# Altium PCB shkb_lite.PcbDoc (part 2 of 2)
Units mm, origin at the board's own origin, x right, y up, seen from the top; angles counter-clockwise.
Board outline 141.5 x 36 mm, 2 copper layers (Top Layer, Bottom Layer), stack 1.57 mm thick; 74 components, 72 nets, 370 pads, 296 vias.
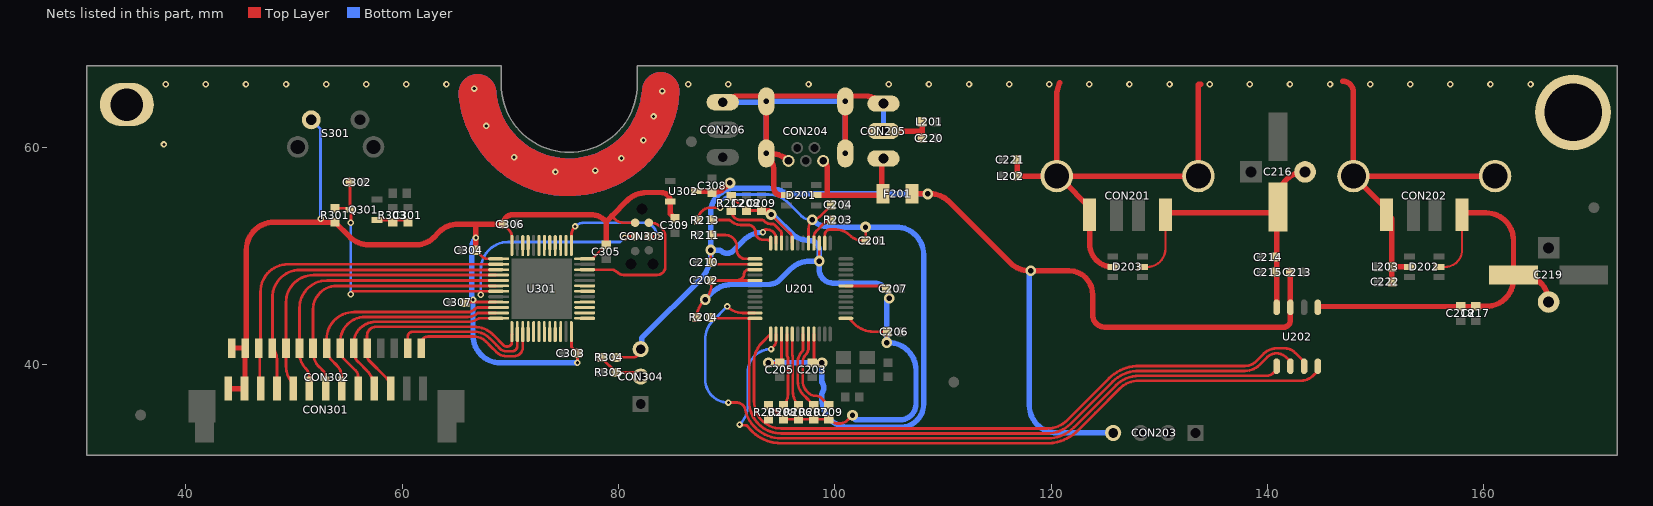
[diagram p2: the nets of this part, all layers, seen from the top]

## Via types
v1: diameter 0.6, hole 0.3, Top Layer to Bottom Layer, tented both sides, 257 vias
v2: diameter 0.6, hole 0.3, Top Layer to Bottom Layer, tented bottom, 25 vias
v3: diameter 1, hole 0.5, Top Layer to Bottom Layer, tented both sides, 14 vias

## Nets (pads, with @x,y where several pads share a name; then routed paths per layer and width w, separated by ;. In a path a pad name is that pad's centre, name@x,y a point inside that pad or via, vN(x,y) a via of type N, cw(c..) or ccw(c..) an arc to the next point about the centre after c; other vN are vias at no path point) (continued)
NetC301_2: C301.2 Q301.1 R303.1 | length 2.7
  Top Layer w0.254: Q301.1@57.658,53.34 C301.2@60.289,53.34
  Top Layer w0.5: C301.2@60.497,53.132 C301.2@60.522,53.132
NetCON304_2: CON304.2 R304.2 R305.1 | length 4.4
  Top Layer w0.254: R304.2@78.471,40.64 78.744,40.367 78.744,40.27 79.473,39.541 79.498,39.541 79.771,39.268 R305.1@79.771,39.243 81.661,39.243 cw(c81.661,38.862) CON304.2@82.042,38.862
NetR203_2: R203.2 U201.28 | length 3
  Top Layer w0.254: U201.28@98.065,51.198 98.065,51.76 cw(c98.882,51.76) 98.304,52.338 99.055,53.089 cw(c99.68,52.464) 99.069,53.103 cw(c99.68,52.464) R203.2@99.68,53.348
NetR206_1: R206.1 U201.5 | length 6.7
  Top Layer w0.254: U201.5@96.065,42.798 96.065,40.875 ccw(c96.319,40.876) 96.077,40.798 cw(c95.335,40.555) 96.116,40.555 96.116,37.5 ccw(c97.929,37.5) R206.1@96.647,36.218
NetR207_1: R207.1 U201.7 | length 7.3
  Top Layer w0.254: U201.7@97.065,42.798 97.065,41.377 cw(c96.811,41.377) 97.012,41.222 cw(c96.641,41.51) 96.972,41.177 ccw(c97.948,40.204) 96.785,40.943 ccw(c97.948,40.204) 96.595,40.464 ccw(c97.948,40.204) 96.57,40.204 96.57,38.437 ccw(c98.369,38.437) 97.096,37.166 ccw(c98.369,38.437) 97.098,37.164 97.223,37.039 ; 97.223,37.039 ccw(c98.19,38.003) 97.225,37.037 ccw(c98.19,38.003) 97.305,36.963 cw(c97.141,36.77) 97.353,36.909 97.746,36.516 97.746,36.491 98.019,36.218 R207.1@98.044,36.218
NetR208_1: R208.1 U201.4 | length 7.3
  Top Layer w0.254: R208.1@95.25,36.218 ccw(c94.255,37.213) 95.662,37.213 95.662,40.555 ; U201.4@95.565,42.798 95.565,40.875 ccw(c95.819,40.876) 95.607,40.737 cw(c95.335,40.555) 95.662,40.555 ; 95.662,40.013 95.662,40.555
NetR209_1: R209.1 U201.8 | length 7.8
  Top Layer w0.254: U201.8@97.565,42.798 97.565,41.51 cw(c96.641,41.51) 97.295,40.858 ccw(c97.948,40.204) 97.024,40.204 97.024,38.437 ccw(c98.369,38.437) 97.418,37.486 97.545,37.359 ccw(c98.19,38.003) 98.19,37.092 cw(c98.19,36.241) 98.791,36.843 R209.1@99.28,36.355
NetR211_2: R211.2 U201.37 | length 5.4
  Top Layer w0.254: R211.2@88.661,51.976 R211.2@88.661,51.951 89.871,51.951 cw(c89.871,50.89) 90.932,50.89 90.932,50.554 ccw(c91.738,50.554) 91.738,49.748 U201.37@92.615,49.748
NetR212_1: R212.1 U201.34 | length 6.6
  Top Layer w0.254: R212.1@90.424,54.222 ccw(c91.306,54.222) 91.306,53.34 93.267,53.34 cw(c93.266,53.086) 93.454,53.257 ccw(c94.107,53.848) 94.206,52.973 cw(c94.234,52.72) 94.413,52.9 94.738,52.575 ; 94.738,52.574 94.991,52.322 cw(c94.811,52.143) 95.065,52.143 U201.34@95.065,51.198
NetR213_2: R213.2 U201.36 | length 6.5
  Top Layer w0.254: R213.2@88.661,53.34 90.195,53.34 cw(c90.194,53.086) 90.371,53.268 ccw(c91.306,54.222) 91.306,52.886 91.982,52.886 cw(c91.982,52.204) 92.664,52.208 cw(c91.982,52.204) 92.664,52.204 ccw(c93.345,52.197) 93.345,51.516 93.747,51.516 cw(c93.747,51.198) 94.047,51.304 cw(c93.747,51.198) U201.36@94.065,51.198
NRST: C302.1 CON303.3 Q301.3 R301.2 U301.7 | length 43.6
  Top Layer w0.254: R301.2@53.791,54.432 55.116,54.432 Q301.3@55.173,54.375 ; C302.1@55.173,56.83 Q301.3@55.173,54.375 ; v1(55.245,46.482) 55.245,46.576 55.384,46.715 55.384,46.748 U301.7@68.669,46.748 ; v1(55.245,53.086) 55.258,53.099 Q301.3@55.258,54.29 Q301.3@55.173,54.375 ; v1(80.578,51.708) 80.671,51.708 80.779,51.816 CON303.3@81.534,51.816
  Bottom Layer w0.254: v1(55.245,46.482) v1(55.245,53.086) ; v1(67.271,46.429) 67.271,48.768 cw(c69.811,48.768) 69.811,51.308 80.137,51.308 v1@80.518,51.689
OVCB1: R204.1 U201.48 U202.2 | length 70.1
  Top Layer w0.254: R204.1@88.534,44.331 88.617,44.248 U201.48@92.075,44.248 ; 92.091,36.265 ccw(c95.04,36.574) 95.04,33.609 119.679,33.609 ccw(c119.679,36.149) 119.945,33.623 ccw(c119.656,36.603) 121.774,34.487 125.664,38.377 cw(c128.104,35.941) 125.668,38.381 cw(c128.104,35.941) 127.87,39.381 cw(c128.071,36.849) 128.071,39.389 137.922,39.389 ccw(c137.922,41.275) 139.254,39.94 ccw(c137.922,41.275) 139.257,39.943 139.981,40.667 cw(c140.836,39.811) 140.836,41.021 cw(c140.836,39.811) 141.691,40.667 142.113,40.245 U202.2@142.113,39.82 ; U201.48@92.615,44.248 92.096,44.248 92.075,44.227 92.075,36.574 ccw(c95.04,36.574) 92.837,34.589 ccw(c95.04,36.574) 92.859,34.565 ; 93.319,34.159 ccw(c95.04,36.574) 94.554,33.649
OVCB2: R205.1 U201.1 U202.3 | length 62.6
  Top Layer w0.254: U201.1@94.065,42.798 93.238,41.971 ccw(c94.95,40.259) 92.529,40.259 92.529,36.574 ccw(c95.04,36.574) 95.04,34.063 119.656,34.063 ccw(c119.656,36.603) 121.452,34.807 125.342,38.697 cw(c128.104,35.941) 125.348,38.703 cw(c128.104,35.941) 127.836,39.834 cw(c128.071,36.849) 128.071,39.843 137.922,39.843 ccw(c137.922,41.275) 138.934,40.263 139.659,40.987 cw(c140.836,39.811) 139.661,40.989 cw(c140.836,39.811) 140.836,41.475 141.591,41.475 cw(c141.591,40.118) 142.55,41.077 143.383,40.245 U202.3@143.383,39.82
PA0: CON301.6 CON302.8 U301.10 | length 22.2
  Top Layer w0.254: 53.466,40.387 cw(c54.583,41.502) 53.228,40.693 cw(c54.583,41.502) CON302.8@53.005,41.502 53.005,42.291 cw(c55.545,42.291) 55.545,44.831 66.062,44.831 ccw(c66.062,45.698) 66.675,45.085 cw(c67.069,44.691) 67.069,45.248 U301.10@68.669,45.248 ; 53.467,40.386 53.944,39.909 cw(c52.792,38.756) 54.422,38.756 CON301.6@54.422,37.749
PA1: CON301.5 CON302.9 U301.11 | length 20.8
  Top Layer w0.254: CON301.5@55.922,37.749 55.922,38.862 ccw(c55.102,38.862) 55.682,39.441 54.478,40.645 54.478,41.279 CON302.9@54.255,41.502 54.255,42.052 cw(c56.579,42.052) 56.579,44.377 66.062,44.377 ccw(c66.062,45.698) 66.915,44.689 cw(c67.077,44.494) 67.076,44.748 U301.11@68.669,44.748
PA2: CON301.4 CON302.10 U301.12 | length 19.2
  Top Layer w0.254: 55.943,40.196 cw(c57.003,41.255) 55.711,40.496 cw(c57.003,41.255) 55.505,41.255 CON302.10@55.505,41.502 55.505,41.897 cw(c57.531,41.897) 55.809,42.965 cw(c57.531,41.897) 56.463,43.619 cw(c57.531,41.897) 57.531,43.923 66.062,43.923 ccw(c66.062,45.698) 67.027,44.208 cw(c67.163,43.994) 67.162,44.248 U301.12@68.669,44.248 ; 55.944,40.195 56.737,39.402 cw(c55.084,37.749) 57.199,38.746 cw(c55.084,37.749) CON301.4@57.422,37.749
PA3: CON301.3 CON302.11 U301.13 | length 21.2
  Top Layer w0.254: CON301.3@58.922,37.749 ccw(c57.446,37.749) 58.489,38.793 56.908,40.374 cw(c57.277,40.744) 56.755,40.744 CON302.11@56.755,41.502 56.755,42.658 cw(c57.566,42.658) 57.566,43.469 66.639,43.469 cw(c66.639,41.014) 68.373,42.752 cw(c66.639,41.014) 68.378,42.747 69.368,41.757 ccw(c69.612,42) 69.612,41.656 69.754,41.656 ccw(c69.754,42.037) 70.135,42.037 70.135,42.764 U301.13@70.144,42.773
PA4: CON302.14 U301.14 | length 13.4
  Top Layer w0.254: CON302.14@60.505,41.502 60.505,42.545 cw(c60.975,42.545) 60.975,43.015 66.639,43.015 cw(c66.639,41.014) 68.053,42.43 cw(c66.639,41.014) 68.055,42.428 68.703,41.779 69.045,41.438 ccw(c69.612,42) 69.046,41.437 ccw(c69.612,42) 69.048,41.435 ccw(c69.612,42) 69.612,41.202 70.165,41.202 ccw(c70.165,41.681) 70.644,41.681 U301.14@70.644,42.773
PA5: CON302.15 U301.15 | length 12.5
  Top Layer w0.254: CON302.15@61.755,41.502 61.755,41.943 cw(c62.373,41.943) 61.767,42.064 cw(c62.373,41.943) 62.373,42.561 66.639,42.561 cw(c66.639,41.014) 67.732,42.108 68.186,41.655 68.723,41.118 ccw(c69.612,42) 68.724,41.116 ccw(c69.612,42) 68.728,41.113 ccw(c69.612,42) 69.612,40.748 70.353,40.748 ccw(c70.353,41.539) 71.144,41.539 U301.15@71.144,42.773
PA6: U301.16
PA7: U301.17
PA9: U301.30
PA10: U301.31
PA15: U301.38
PB0: U301.18
PB1: U301.19
PB2: U301.20
PB3: U301.39
PB4: U301.40
PB5: U301.41
PB6: U301.42
PB7: U301.43
PB8: U301.45
PB9: U301.46
PB10: U301.21
PB11: U301.22
PB12: U301.25
PB13: U301.26
PB14: U301.27
PB15: U301.28
PC13: CON301.11 CON302.3 U301.2 | length 32.3
  Top Layer w0.254: CON301.11@46.922,37.749 46.838,37.833 46.838,41.419 CON302.3@46.755,41.502 46.9,41.648 46.9,46.708 cw(c49.44,46.708) 49.44,49.248 U301.2@68.669,49.248
PC14: CON301.10 CON302.4 U301.3 | length 30.7
  Top Layer w0.254: CON301.10@48.422,37.749 48.422,40.496 ccw(c46.998,40.496) CON302.4@48.005,41.502 48.005,46.185 cw(c50.545,46.185) 50.545,48.725 68.059,48.725 68.082,48.748 U301.3@68.669,48.748
PC15: CON301.9 CON302.5 U301.4 | length 29
  Top Layer w0.254: CON301.9@49.916,37.744 CON301.9@49.922,37.749 49.922,38.227 cw(c51.532,39.837) 49.255,39.837 CON302.5@49.255,41.502 49.255,45.708 cw(c51.795,45.708) 51.795,48.248 U301.4@68.669,48.248
PF0: CON301.8 CON302.6 U301.5 | length 27.3
  Top Layer w0.254: CON301.8@51.422,37.749 51.422,38.774 ccw(c50.206,38.774) 51.181,39.499 ccw(c50.206,38.774) 51.066,39.633 cw(c52.42,40.988) 50.505,40.988 CON302.6@50.505,41.502 50.505,45.208 cw(c53.045,45.208) 53.045,47.748 U301.5@68.669,47.748
PF1: CON301.7 CON302.7 U301.6 | length 25.8
  Top Layer w0.254: 52.715,39.36 52.338,39.737 cw(c53.747,41.146) 51.755,41.146 CON302.7@51.755,41.502 51.755,45.069 cw(c53.933,45.069) 53.933,47.248 U301.6@68.669,47.248 ; 52.716,39.359 cw(c52.218,38.862) 52.922,38.862 CON301.7@52.922,37.749
PORT1_PWR: C214.2 C215.2 C216.1 CON201.1 D203.5 U202.8 | length 30.7
  Top Layer w0.203: D203.5@128.433,49 128.893,49 ccw(c128.893,50.665) 130.558,50.665 CON201.1@130.558,53.808
  Top Layer w0.5: CON201.1@130.558,54 C216.1@140.843,54 ; U202.8@140.843,45.27 C216.1@140.843,54 ; C216.1@140.97,54.102 140.868,54 C216.1@140.843,54 ; C216.1@143.47,57.785 ccw(c143.47,55.285) 140.97,55.285 C216.1@140.97,54.535 140.843,54.408 C216.1@140.843,54
PORT2_PWR: C217.2 C218.2 C219.1 CON202.1 D202.5 U202.5 | length 40.3
  Top Layer w0.203: D202.5@155.868,49 156.411,49 ccw(c156.411,50.582) 157.993,50.582 CON202.1@157.993,53.808
  Top Layer w0.5: U202.5@144.653,45.27 144.653,45.293 144.699,45.339 C217.2@159.258,45.339 ; CON202.1@157.993,54 160.199,54 cw(c160.199,51.46) 162.739,51.46 C219.1@162.739,48.26 ; C217.2@159.258,45.354 160.199,45.354 ccw(c160.199,47.894) 162.739,47.894 C219.1@162.739,48.26 ; C219.1@165.989,45.76 ccw(c163.489,45.76) 163.489,48.26 C219.1@162.739,48.26
PWRB1: U201.47 U202.1 | length 68.5
  Top Layer w0.254: v1(90.043,45.347) ccw(c91.489,46.793) 91.489,44.748 U201.47@92.615,44.748 ; v1(90.162,36.458) 90.906,36.458 cw(c90.906,35.602) 91.026,36.45 cw(c90.906,35.602) 91.651,36.024 cw(c91.429,35.9) 91.679,35.947 ccw(c95.04,36.574) 91.762,35.602 ccw(c95.04,36.574) 92.329,34.491 ccw(c95.04,36.574) 92.511,34.273 ccw(c95.04,36.574) 95.04,33.155 119.679,33.155 ccw(c119.679,36.149) 119.991,33.171 ccw(c119.656,36.603) 122.096,34.167 125.987,38.057 cw(c128.104,35.941) 125.988,38.059 cw(c128.104,35.941) 128.104,38.935 139.898,38.935 ccw(c139.898,39.88) 140.566,39.212 140.843,39.489 U202.1@140.843,39.82
  Bottom Layer w0.254: v1(90.043,45.347) 88.755,44.059 ccw(c90.551,42.263) 88.011,42.263 88.011,38.609 ccw(c90.162,38.609) v1(90.162,36.458)
PWRB2: U201.2 U202.4 | length 70.3
  Top Layer w0.254: v1(91.186,34.425) 91.252,34.359 91.734,34.359 cw(c91.733,34.105) 91.936,34.257 ccw(c95.04,36.574) 92.176,33.967 ; 92.176,33.967 ccw(c95.04,36.574) 94.286,32.775 ; 92.182,33.96 ccw(c95.04,36.574) 95.04,32.701 117.298,32.701 ccw(c117.3,42.291) 117.307,32.701 119.88,32.701 ccw(c119.88,33.79) 120.068,32.717 ccw(c119.88,33.79) 120.118,32.727 cw(c120.172,32.479) 120.14,32.731 ccw(c119.656,36.603) 120.267,32.749 ; 94.332,41.635 ccw(c93.768,42.198) 94.556,42.08 ; 120.821,32.879 cw(c119.656,36.603) 120.267,32.749 ; U202.4@144.653,39.82 144.653,39.395 144.196,38.938 cw(c143.093,40.041) 143.093,38.481 128.104,38.481 ccw(c128.104,35.941) 126.308,37.737 124.082,35.511 cw(c117.3,42.291) 124.078,35.507 122.418,33.847 cw(c119.656,36.603) 122.412,33.841 122.284,33.713 ccw(c122.416,33.496) 122.248,33.686 cw(c119.656,36.603) 120.267,32.749 ; 94.556,42.08 ccw(c93.768,42.198) 94.565,42.198 U201.2@94.565,42.798 94.556,42.789 94.556,42.08
  Bottom Layer w0.254: v1(91.186,34.425) 91.204,34.443 ccw(c89.408,36.239) 91.948,36.239 91.948,39.251 cw(c94.107,39.251) 92.493,40.685 cw(c94.107,39.251) 92.673,40.865 cw(c94.107,39.251) v1(94.107,41.41)
RAW: CON204.1 CON205.1 D201.5 F201.2 | length 13.1
  Top Layer w0.5: D201.5@98.276,55.634 99.314,55.634 ; CON204.1@98.915,59.05 cw(c97.952,58.087) 98.917,59.048 cw(c97.952,58.087) 99.314,58.087 99.314,55.634 ; CON205.1@104.492,59.022 ccw(c104.492,58.852) 104.322,58.852 104.322,55.634 99.314,55.634
SHIELD: C220.2 C221.2 C222.2 CON201.4 CON201.5 CON202.4 CON202.5 CON204.5 CON204.S CON205.2 CON205.3 CON206.3 D201.2 D202.2 D203.2 L201.2 L202.2 L203.2 pad. | length 193.3
  Top Layer w0.5: CON206.3@89.633,64.229 cw(c91.012,62.85) 91.012,64.8 CON204.S@93.665,64.8 ; 94.996,55.634 cw(c94.996,56.269) 94.361,56.269 94.361,57.82 ccw(c91.985,57.82) CON204.S@93.665,59.5 94.025,59.5 cw(c94.025,57.11) CON204.S@94.047,59.5 ; CON204.5@95.715,58.8 ccw(c94.025,57.11) CON204.S@94.047,59.5 ; CON204.S@100.965,60 CON204.S@100.965,64.3 CON204.S@100.965,64.8 ; CON205.2@104.492,61.562 107.969,61.562 ccw(c107.969,61.655) 108.062,61.655 ; CON205.3@104.492,64.102 ccw(c102.807,62.417) 102.807,64.8 CON204.S@100.965,64.8 ; C220.2@108.062,60.893 108.062,61.655 ; L201.2@108.062,62.417 108.062,61.655 ; C221.2@116.855,58.928 L202.2@116.855,57.404 116.855,57.4 CON201.5@120.508,57.4 ; 120.777,66.04 120.508,65.152 CON201.5@120.508,57.4 ; CON201.4@123.558,53.808 123.558,51.125 ccw(c125.683,51.125) D203.2@125.683,49 ; CON201.4@123.827,54.231 120.764,57.294 ccw(c120.508,57.038) CON201.5@120.508,57.4 ; 133.849,65.892 133.752,65.892 cw(c133.752,65.913) 133.731,65.913 ccw(c133.731,65.79) 133.608,65.79 CON201.5@133.608,57.4 CON201.5@120.508,57.4 ; 146.939,66.167 cw(c146.939,65.163) 147.943,65.163 CON202.5@147.943,57.4 ; CON202.4@150.993,53.808 cw(c150.993,53.308) 151.493,53.308 151.493,47.531 ccw(c151.526,47.531) C222.2@151.526,47.498 ; CON202.4@151.237,54.106 CON202.5@147.943,57.4 ; L203.2@151.526,48.895 cw(c151.631,48.895) 151.631,49 D202.2@153.118,49 ; CON202.5@161.043,57.4 CON202.5@147.943,57.4 ; CON204.S@93.665,64.8 CON204.S@100.965,64.8 ; CON204.S@93.665,64.8 CON204.S@93.665,64.3 93.665,60 cw(c91.985,58.32) CON204.S@94.047,59.5
  Top Layer w3.5: 66.95,65.076 ccw(c75.42,65.791) v1@83.904,65.265
  Bottom Layer w0.5: CON206.3@89.633,64.229 93.594,64.229 ccw(c93.594,64.3) CON204.S@93.665,64.3 ; CON204.S@93.665,59.5 CON204.S@93.665,64.3 ; CON204.S@100.965,59.5 CON204.S@100.965,64.3 CON204.S@93.665,64.3 ; CON205.2@104.492,61.562 CON205.3@104.492,64.102
  Bottom Layer w3.5: 66.95,65.076 ccw(c75.42,65.791) v1@83.904,65.265
  other v1: 74.168,57.785 77.851,57.912 80.264,59.055 70.34,59.136 37.973,60.325 82.296,60.706 67.775,62.032 83.244,62.921 84.031,65.257 66.657,65.486 38.133,65.892 41.842,65.892 45.55,65.892 49.258,65.892 52.967,65.892 56.675,65.892 60.384,65.892 64.092,65.892 86.444,65.892 90.152,65.892 97.569,65.892 104.986,65.892 108.694,65.892 112.403,65.892 116.111,65.892 119.82,65.892 123.528,65.892 127.236,65.892 130.945,65.892 134.653,65.892 138.362,65.892 142.07,65.892 145.778,65.892 149.487,65.892 153.195,65.892 156.904,65.892 160.612,65.892 164.32,65.892
SWCLK: CON303.4 U301.37 | length 10.8
  Top Layer w0.254: U301.37@75.644,51.223 75.644,51.93 cw(c76.792,51.93) 75.936,52.695 cw(c76.792,51.93) v1(75.98,52.742) ; CON303.4@82.804,51.816 v1(83.566,51.816)
  Bottom Layer w0.254: v1@75.98,52.742 cw(c76.811,51.911) 76.811,53.086 82.296,53.086 cw(c82.296,51.816) v1(83.566,51.816)
SWDIO: CON303.2 U301.34 | length 12.8
  Top Layer w0.254: U301.34@77.119,48.748 79.304,48.748 cw(c79.304,47.915) 79.893,48.504 ccw(c80.482,49.093) 80.482,48.26 83.566,48.26 ccw(c83.566,49.022) 84.328,49.022 84.328,51.689 ccw(c82.931,51.689) 84.251,52.147 ccw(c82.931,51.689) 83.389,53.009 ccw(c82.931,51.689) 83.266,53.045 ccw(c82.931,51.689) 82.931,53.086 CON303.2@82.804,53.086
VCC1V8: C201.2 C203.2 C204.2 C205.2 R213.1 U201.3 U201.9 U201.26 U201.29 | length 77.2
  Top Layer w0.254: R213.1@87.361,53.34 cw(c88.504,53.34) 88.504,54.483 v1(89.408,54.483) ; v3(93.853,40.14) 94.895,40.14 ccw(c94.485,40.55) C205.2@94.91,40.155 ccw(c94.485,40.55) 95.065,40.55 U201.3@95.065,42.798 ; U201.29@97.565,51.198 97.565,52.534 cw(c98.731,52.534) v3(97.907,53.358) ccw(c97.907,54.292) 98.567,53.632 C204.2@99.68,54.745 ; C203.2@97.932,40.14 v3(98.806,40.14) ; C203.2@98.065,40.175 U201.9@98.065,42.798 ; U201.26@99.065,51.198 99.074,51.207 99.074,51.97 cw(c99.563,51.97) 99.563,52.459 100.12,52.459 cw(c100.12,50.725) 101.346,51.951 ccw(c102.572,53.177) 102.572,51.443 C201.2@102.855,51.443 ; C201.2@102.845,51.453 v3@102.845,52.673
  Top Layer w0.5: v3(102.834,52.684) v3@102.845,52.673 ; C201.2@102.845,51.453 C201.2@102.855,51.443
  Bottom Layer w0.254: v1(89.408,54.483) 89.408,54.704 ccw(c89.154,54.704) 89.407,54.724 89.396,54.869 cw(c89.649,54.889) 89.448,55.044 cw(c90.771,54.017) 89.624,55.238 89.64,55.252 cw(c90.771,54.017) 90.771,55.692 93.878,55.692 cw(c93.878,53.152) 95.674,54.948 96.901,53.721 ccw(c97.776,54.596) 97.776,53.358 v3(97.907,53.358)
  Bottom Layer w0.5: v3(93.853,40.14) v3(98.806,40.14) 98.806,38.356 ccw(c99.249,38.587) 98.835,38.307 cw(c98.171,37.854) 98.87,37.457 ccw(c99.306,37.212) 98.806,37.214 98.806,36.711 ccw(c101.346,36.711) 101.078,34.185 ccw(c101.346,36.711) 101.346,34.171 106.045,34.171 ccw(c106.045,36.33) 108.204,36.33 108.204,50.144 ccw(c105.664,50.144) 105.664,52.684 v3(102.834,52.684) 99.535,52.684 cw(c99.535,54.987) v3(97.907,53.358)
VCC3V3: C202.2 C206.2 C207.2 C208.2 C209.2 R204.2 R205.2 R206.2 R207.2 R208.2 R209.2 R212.2 U201.13 U201.19 U201.27 U201.32 U201.39 U201.41 | length 83.3
  Top Layer w0.254: R204.2@87.234,44.331 cw(c89.344,44.331) 87.852,45.823 v3(88.011,45.982) ccw(c86.649,47.344) 88.575,47.344 C202.2@88.575,47.76 ; C202.2@88.702,47.887 88.832,47.757 90.864,47.757 ; R212.2@90.424,55.522 90.722,55.249 91.523,54.495 C208.2@91.821,54.222 C209.2@93.218,54.222 ; U201.41@92.615,47.748 92.606,47.757 90.864,47.757 ; U201.39@92.615,48.748 92.032,48.748 ccw(c92.032,48.308) 91.891,48.725 ccw(c92.032,48.308) 91.852,48.71 ccw(c92.032,48.308) 91.592,48.308 ccw(c92.065,48.248) 91.588,48.265 cw(c91.334,48.274) 91.584,48.226 cw(c91.164,48.309) 91.467,48.006 cw(c90.864,48.608) 90.864,47.757 ; R205.2@93.853,36.218 cw(c93.853,35.984) 93.88,36.216 cw(c93.853,35.984) 94.018,36.15 R208.2@95.25,34.918 R206.2@96.647,34.918 R207.2@98.044,34.918 R209.2@99.441,34.918 99.471,34.888 ccw(c100.367,35.784) 99.633,34.751 ccw(c100.367,35.784) 100.367,34.517 ccw(c100.367,35.723) 101.22,34.87 ; v3(94.107,53.848) 95.758,52.197 ccw(c95.937,52.377) 95.807,52.159 cw(c95.565,51.748) 96.042,51.748 96.042,51.302 ccw(c96.296,51.304) U201.32@96.065,51.198 ; v3(98.552,49.538) 98.558,49.545 98.558,51.192 U201.27@98.565,51.198 ; U201.19@101.015,47.248 104.51,47.248 C207.2@104.76,46.998 105.033,46.725 v3(105.033,46.105) ; 101.22,34.87 v3(101.632,35.282) ; U201.13@101.29,44.248 101.777,43.761 ccw(c103.573,45.557) 102.604,43.209 ccw(c103.573,45.557) 103.573,43.017 C206.2@104.775,43.017 ; 104.775,42.553 C206.2@104.775,43.017 ; C206.2@104.83,43.017 C206.2@104.775,43.017
  Top Layer w0.5: C209.2@93.218,54.222 93.733,54.222 cw(c93.733,53.848) v3(94.107,53.848)
  Bottom Layer w0.5: v3(88.011,45.982) 88.664,46.635 cw(c90.46,44.839) 89.408,47.151 cw(c90.46,44.839) 90.46,47.379 93.852,47.379 ccw(c93.852,48.904) 94.93,47.826 95.899,48.794 cw(c97.695,46.998) 97.695,49.538 v3(98.552,49.538) ; v3(94.107,53.848) cw(c94.107,53.459) v3@94.382,53.734 ; v3@94.382,53.734 96.154,51.962 ccw(c97.663,53.896) 97.663,51.443 cw(c97.663,50.554) 98.552,50.554 v3(98.552,49.538) ; v3(101.632,35.282) ccw(c102.043,35.282) 102.043,34.871 106.045,34.871 ccw(c106.045,36.33) 107.504,36.33 107.504,39.461 ccw(c104.964,39.461) 104.964,42.001 v3(104.804,42.001) 104.804,45.876 cw(c105.033,45.876) v3(105.033,46.105) ccw(c103.632,46.105) 103.632,47.506 99.822,47.506 cw(c99.822,48.776) 98.827,47.986 cw(c99.822,48.776) 98.552,48.776 v3(98.552,49.538)
VCC3V3_MCU: C303.2 C304.2 C305.2 C306.2 C307.2 C309.2 CON301.12 CON301.13 CON302.1 CON302.2 CON303.1 R301.1 S301.2 U301.1 U301.9 U301.24 U301.36 U301.48 U302.2 | length 110.4
  Top Layer w0.254: C307.2@65.801,45.72 65.829,45.748 U301.9@68.669,45.748 ; C304.2@66.817,50.546 67.471,49.892 ccw(c67.818,50.238) 67.818,49.748 U301.1@68.669,49.748 ; C306.2@69.327,52.934 69.6,52.661 69.625,52.661 69.885,52.401 ; 69.885,52.401 cw(c69.258,51.775) 70.144,51.775 U301.48@70.144,51.223 ; U301.24@75.644,42.773 75.644,41.592 75.917,41.319 75.942,41.319 76.215,41.046 C303.2@76.215,41.021 76.2,41.006 v1(76.2,40.132) ; U301.36@77.119,49.748 77.682,49.748 77.703,49.769 77.703,49.89 78.569,50.756 78.569,50.781 78.842,51.054 C305.2@78.867,51.054 ; 79.375,53.721 79.692,53.404 ccw(c80.459,54.17) 80.459,53.086 CON303.1@81.534,53.086
  Top Layer w0.5: CON301.13@43.922,37.749 CON301.12@45.422,37.749 45.463,37.791 CON302.2@45.463,41.461 ; CON302.1@44.255,41.502 CON302.2@45.463,41.502 ; CON302.2@45.505,41.502 45.593,41.591 45.593,50.592 cw(c48.133,50.592) 48.133,53.132 R301.1@53.791,53.132 55.125,51.798 ccw(c56.921,53.594) 55.349,51.599 ccw(c56.921,53.594) 56.921,51.054 61.321,51.054 ccw(c61.321,53.248) 62.873,51.697 63.391,52.215 cw(c65.187,50.419) 65.187,52.959 C306.2@69.327,52.959 ; C304.2@66.817,50.546 v1(66.817,51.689) 66.817,52.832 ; C306.2@69.327,52.934 cw(c70.227,52.934) C306.2@69.327,52.959 ; 78.866,53.214 ccw(c77.368,51.714) 77.368,53.834 70.227,53.834 ccw(c70.227,52.934) 69.457,53.4 ccw(c70.227,52.934) C306.2@69.327,52.959 ; C305.2@78.867,51.054 78.867,53.213 79.375,53.721 80.79,55.136 cw(c82.586,53.34) 82.586,55.88 83.956,55.88 cw(c83.956,55.057) U302.2@84.779,55.057 84.779,53.925 85.042,53.662 85.042,53.632 85.192,53.482 C309.2@85.217,53.482
  Bottom Layer w0.254: S301.2@51.593,62.602 52.451,61.745 v1(52.451,53.467)
  Bottom Layer w0.5: v1(66.817,51.689) ccw(c67.773,50.733) 66.421,50.733 66.421,46.128 66.548,46.001 66.548,42.672 ccw(c69.088,42.672) 69.088,40.132 v1(76.2,40.132)
  other v1: 66.548,45.974
VCC5V: C210.2 C213.2 C308.2 CON203.1 CON304.3 F201.1 R304.1 U201.35 U201.38 U202.7 U302.3 | length 124.1
  Top Layer w0.254: R304.1@79.771,40.64 81.28,40.64 ccw(c81.28,41.402) CON304.3@82.042,41.402 ; v3(88.519,50.554) 88.519,49.467 88.586,49.447 C210.2@88.848,49.369 ; C210.2@88.575,49.411 ccw(c88.969,49.805) 88.969,49.248 U201.38@92.615,49.248 ; v1(93.345,52.197) cw(c93.607,52.197) 93.607,52.459 93.726,52.459 cw(c93.726,51.62) 94.501,51.943 cw(c94.065,51.748) 94.52,51.89 cw(c93.726,51.62) 94.565,51.62 U201.35@94.565,51.198
  Top Layer w0.5: U302.3@87.179,56.007 C308.2@88.646,56.007 ; C308.2@88.646,55.865 88.821,55.874 88.824,55.874 ccw(c88.646,57.668) 89.347,56.007 ccw(c88.646,57.668) 89.497,56.078 ccw(c89.26,56.518) 89.558,56.117 ccw(c89.26,56.518) 89.648,56.204 cw(c89.999,55.922) 89.68,56.24 ; 89.681,56.241 cw(c89.999,55.922) 89.822,56.336 ccw(c89.623,56.794) 89.921,56.393 v3(90.297,56.769) ; F201.1@107.141,55.753 v3(108.585,55.753) 108.593,55.761 108.795,55.761 cw(c108.795,53.221) 110.591,55.017 116.223,49.385 ccw(c118.019,51.181) 118.019,48.641 v3(118.11,48.641) 121.645,48.641 cw(c121.645,46.461) 123.825,46.461 123.825,44.577 ccw(c124.968,44.577) 124.403,43.584 ccw(c124.968,44.577) 124.968,43.434 141.484,43.434 ccw(c141.484,44.063) 142.113,44.063 U202.7@142.113,45.27 142.105,45.277 142.105,48.507 C213.2@142.098,48.514
  Bottom Layer w0.5: CON304.3@82.042,41.402 82.137,41.497 82.137,42.428 87.789,48.08 ccw(c85.043,50.212) 88.519,50.212 v3(88.519,50.554) ; v1(93.345,52.197) ccw(c93.345,49.634) 91.533,51.446 90.764,50.677 ccw(c91.119,50.325) 90.707,50.609 cw(c90.043,51.062) 90.043,50.258 cw(c90.043,51.062) 89.532,50.441 ccw(c89.216,50.054) 89.217,50.554 v3(88.519,50.554) ; v3(108.585,55.753) 95.596,55.753 ccw(c93.878,53.152) 93.878,56.269 90.771,56.269 ccw(c90.771,54.017) 88.519,54.017 v3(88.519,50.554) ; v3(118.11,48.641) ccw(c118.11,48.514) 117.983,48.514 117.983,36.195 ccw(c120.523,36.195) 120.523,33.655 CON203.1@125.73,33.655
pads on no net: CON204.4 CON303.0 CON303.6 D201.3 D201.4 D202.1 D202.6 D203.1 D203.6 FID1.0 FID2.0 FID3.0 FID4.0 U201.43 U201.44 U201.45 U201.46

## Polygon pours and split planes (outlines as drawn)
GND on Bottom Layer "Bottom Layer-GND" (solid, remove dead copper, pour order 0): 30.843,31.602 30.843,67.602 69.143,67.602 69.143,65.902 ccw(c75.443,65.902) 75.443,59.602 ccw(c75.443,65.902) 81.743,65.902 81.743,67.602 172.344,67.602 172.344,31.602
GND on Top Layer "Top Layer-GND" (solid, remove dead copper, pour order 1): 30.843,31.602 30.843,67.602 69.143,67.602 69.143,65.902 ccw(c75.443,65.902) 75.443,59.602 ccw(c75.443,65.902) 81.743,65.902 81.743,67.602 172.344,67.602 172.344,31.602

## Other copper
Top Layer:
  region net SHIELD: 171.966,56.342 171.966,67.086 162.433,67.086 162.433,56.342
  rectangle net SHIELD: 82.126,64.902 171.966,67.061
  rectangle net SHIELD: 31.377,64.902 68.715,67.061
  rectangle net SHIELD: 31.377,59.796 41.664,67.061
  pour cut-out: 64.857,64.9 ccw(c75.42,65.791) 86,65.135 ccw(c83.904,65.265) 86.004,65.265 ccw(c83.904,65.265) 81.808,65.395 cw(c75.42,65.791) 69.043,65.253 ccw(c66.95,65.076)
  pour cut-out: 40.318,64.597 40.318,67.602 171.919,67.602 171.919,64.597
  pour cut-out: 29.726,68.763 29.777,68.813 41.918,68.813 41.918,59.436 29.715,59.436
  pour cut-out: 172.169,56.088 147.077,56.088 147.077,66.35 172.169,66.35
  pour cut-out: 134.498,55.858 119.639,55.858 119.639,65.902 134.498,65.902
Bottom Layer:
  rectangle net SHIELD: 31.377,59.796 41.664,67.061
  rectangle net SHIELD: 31.377,64.902 68.715,67.061
  rectangle net SHIELD: 82.126,64.902 171.966,67.061
  region net SHIELD: 171.966,56.342 171.966,67.086 162.433,67.086 162.433,56.342
  pour cut-out: 64.857,64.9 ccw(c75.42,65.791) 86,65.135 ccw(c83.904,65.265) 86.004,65.265 ccw(c83.904,65.265) 81.808,65.395 cw(c75.42,65.791) 69.043,65.253 ccw(c66.95,65.076)
  pour cut-out: 172.169,56.088 147.077,56.088 147.077,66.35 172.169,66.35
  pour cut-out: 134.498,55.858 119.639,55.858 119.639,65.902 134.498,65.902
  pour cut-out: 40.318,64.597 40.318,67.602 171.919,67.602 171.919,64.597
  pour cut-out: 29.726,68.763 29.777,68.813 41.918,68.813 41.918,59.436 29.715,59.436

## Silkscreen, mask and mechanical layers (free items; w line width, h text height)
Top Overlay:
  lines w0.2: 89.535,57.912 104.648,57.912 104.648,67.056 89.535,67.056 89.535,57.912
  text "JIS" at 62.865,41.148 h2
  text "5V/VCC" at 83.947,41.021 h0.75
  text "RGB DATA (5V)" at 84.074,38.354 h0.75
  text "ANSI" at 62.865,37.973 h2
  text "VCC" at 125.349,37.592 h0.75 r270
  text "GND" at 133.096,37.592 h0.75 r270
  text "DN" at 127.889,36.83 h0.75 r270
  text "DP" at 130.429,36.83 h0.75 r270
  text "GND" at 84.074,35.687 h0.75
  text "Internal USB port is unprotected, use with care" at 71.895,32.893 h2
Bottom Overlay:
  drawing of 10 lines, arcs and shapes, not listed
  text "Reset/DFU" at 57.985,65.532 h2
  text "Extra pads for USB-C Riser PCB" at 126.606,55.753 h2
  text "SHKB Lite" at 151.934,49.276 h3.3
  text "Rev B1" at 147.701,47.625 h2
  text "5V/VCC" at 80.01,41.021 h0.75
  text "RGB DATA (5V)" at 80.01,38.481 h0.75
  text "VCC" at 126.111,37.592 h0.75 r90
  text "GND" at 133.731,37.592 h0.75 r90
  text "DN" at 128.651,36.83 h0.75 r90
  text "DP" at 131.191,36.83 h0.75 r90
  text "GND" at 80.01,35.941 h0.75
  text "Internal USB port is unprotected, use with care" at 131.432,32.766 h2
  text "For use with JIS HHKB:  / Populate the different JIS connector and flash the PCB with the JIS firmware. /  / Either swap the bottom case with a ANSI HHKB or make holes for the USB-A ports if the hub is needed" at 69.278,32.639 h2
Top Solder:
  drawing of 2 lines, arcs and shapes, not listed
  text "SHKB Lite" at 148.44,35.772 h3.3
  text "Rev B1" at 153.289,33.909 h2
outline:
  the board outline again, w0.1

## Text inside footprints (layer, text, board x,y; h text height)
C216: Top Overlay "+" at 142.646,60.833 h1.52 r270; Top Overlay "-" at 137.719,55.728 h1.52 r270
C219: Top Overlay "-" at 163.932,51.511 h1.52 r180; Top Overlay "+" at 169.037,46.584 h1.52 r180